# Altium PCB rpi_board.PcbDoc (part 1 of 2)
Units mm, origin at the board's own origin, x right, y up, seen from the top; angles counter-clockwise.
Board outline 68.45 x 53.59 mm, 2 copper layers (Top Layer, Bottom Layer), stack 1.569 mm thick; 73 components, 83 nets, 335 pads, 96 vias.
Unrouted connection lines stored in the file: 3.
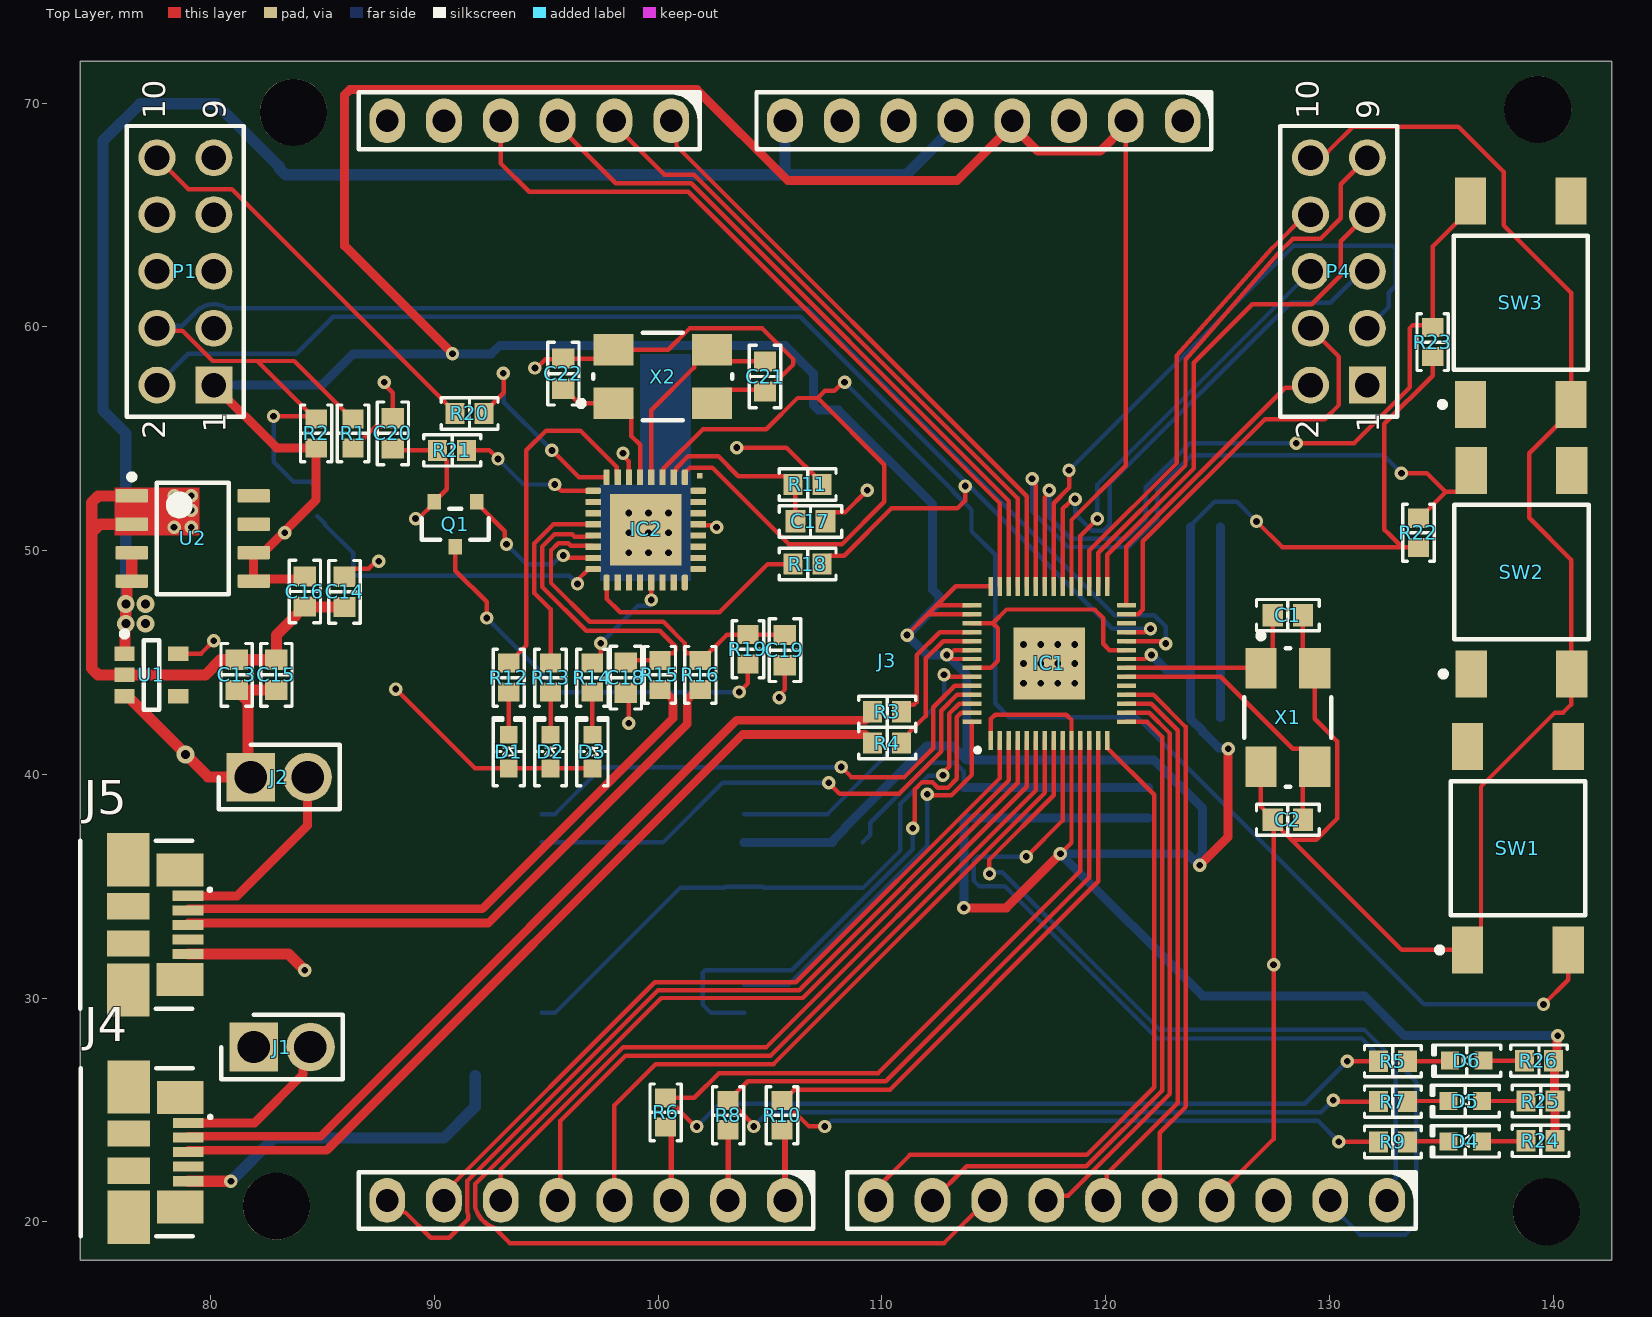
[diagram p0: Top Layer view]
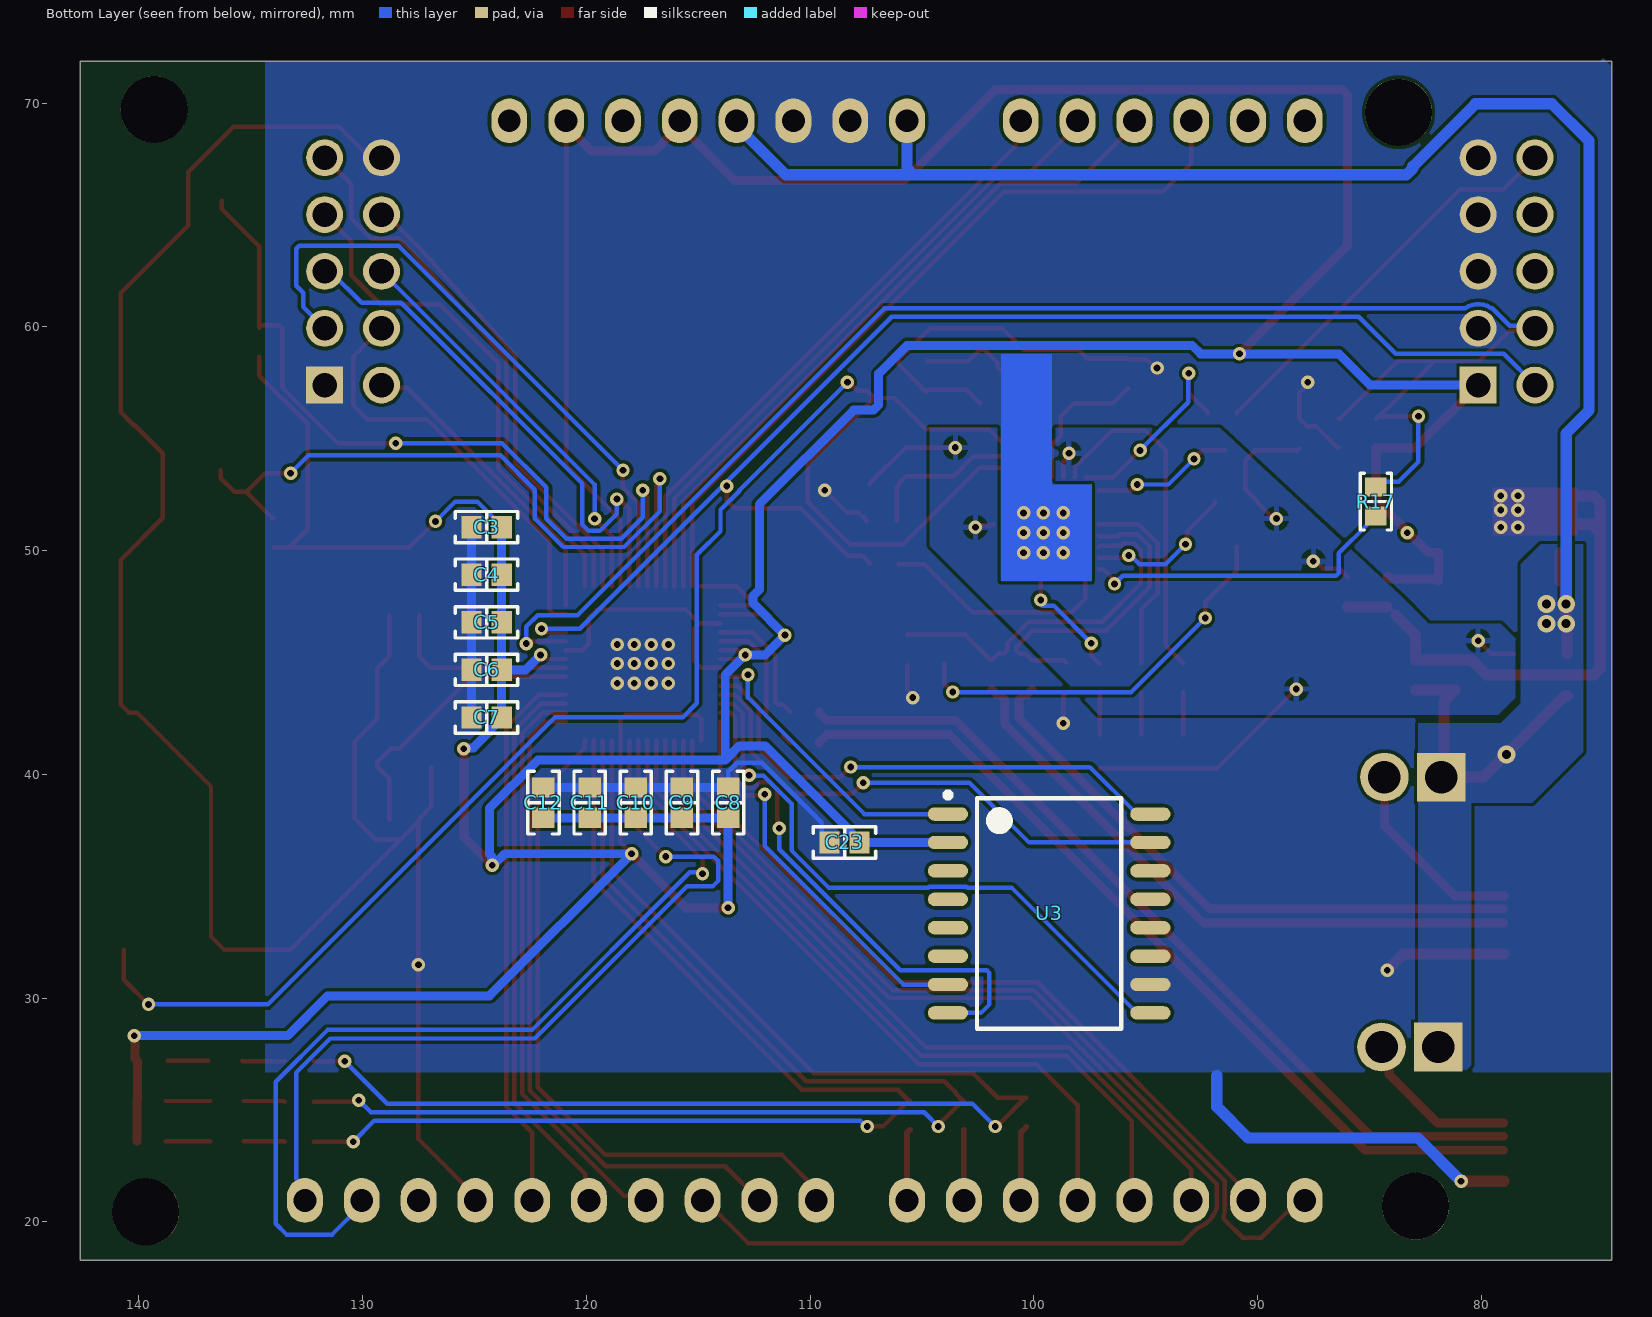
[diagram p1: Bottom Layer view, seen from below]

## Layer stack, top to bottom
Top Solder: solder mask 0.0254, SM-001, Dk 4
Top Layer: signal copper 0.035
Dielectric 1: core 1.4986, Core-043, Dk 4.3
Bottom Layer: signal copper 0.035
Bottom Solder: solder mask 0.0254, SM-001, Dk 4

## Board outline
74.168,18.288 142.621,18.288 142.621,71.882 74.168,71.882

## Design rules (kind name [scope] priority, off if disabled: settings)
Clearance [All] p1: gap=0.15 ignorepadtopadclearanceinfootprint=FALSE
DiffPairsRouting [All] p1: maxlimit=0.254 minlimit=0.2 mostfreqgap=0.2 toplayer_minwidth=0.2 toplayer_maxwidth=0.5 toplayer_prefwidth=0.2 bottomlayer_minwidth=0.2 bottomlayer_maxwidth=0.5 bottomlayer_prefwidth=0.2 maxuncoupledlength=12.7
PolygonConnect PolygonConnect_5 [All vs IsNamedPolygon('GND_L02_P005')] p1: connectstyle=Direct reliefconductorwidth=0.254 reliefentries=4 polygonreliefangle="90 Angle" airgapwidth=0.254
PolygonConnect PolygonConnect_4 [All vs IsNamedPolygon('GND_L02_P004')] p2: connectstyle=Direct reliefconductorwidth=0.254 reliefentries=4 polygonreliefangle="90 Angle" airgapwidth=0.254
PolygonConnect PolygonConnect_3 [All vs IsNamedPolygon('3V3_MCU_L01_P003')] p3: connectstyle=Relief reliefconductorwidth=0.254 reliefentries=4 polygonreliefangle="90 Angle" airgapwidth=0.254
PolygonConnect PolygonConnect_2 [All vs IsNamedPolygon('3V3_MCU_L01_P003')] p4: connectstyle=Direct reliefconductorwidth=0.254 reliefentries=4 polygonreliefangle="90 Angle" airgapwidth=0.254
PolygonConnect PolygonConnect_1 [All vs IsNamedPolygon('5V_L02_P002')] p5: connectstyle=Direct reliefconductorwidth=0.254 reliefentries=4 polygonreliefangle="90 Angle" airgapwidth=0.254
PolygonConnect [All] p6: connectstyle=Relief reliefconductorwidth=0.254 reliefentries=4 polygonreliefangle="90 Angle" airgapwidth=0.254
RoutingVias [All] p1: holewidth=0.3 width=0.6 viastyle="Through Hole" minholewidth=0.3 minwidth=0.6 maxholewidth=0.3 maxwidth=0.6
SolderMaskExpansion [All] p1: expansion=0.102 istentingtop=FALSE
Width [All] p1: maxlimit=0.8 minlimit=0.2 preferedwidth=0.2
29 further rules are at their usual default settings.

## Classes and differential pairs
component class POWER: C13 C14 C15 C16 U1 U2
component class PERIPHERALS: C23 D4 D5 D6 R22 R23 R24 R25 R26 SW2 SW3 U3
component class MCU_CORE: C1 C2 C3 C4 C5 C6 C7 C8 C9 C10 C11 C12 IC1 J1 J4 P1 R1 R2 R3 R4 R5 R6 R7 R8 R9 R10 X1
component class HEADERS: J3 P4
component class DEBUG: C17 C18 C19 C20 C21 C22 D1 D2 D3 IC2 J2 J5 Q1 R11 R12 R13 R14 R15 R16 R17 R18 R19 R20 R21 SW1 X2
differential pair USB_DE: +USB_DE_P -USB_DE_N
differential pair USB_DM: +USB_DM_P -USB_DM_N
differential pair USB_R: +USB_R_P -USB_R_N
differential pair USB_D: +USB_D_P -USB_D_N

## Components (designator, comment, footprint, x,y, rotation, side; value= is the part's Value field where it differs from the comment)
C1 "18pF" "CAP 0603_1608" 128.143,47.117 r180 top
C2 "18pF" "CAP 0603_1608" 128.143,37.973 r0 top
C3 "0.1µF" "CAP 0603_1608" 124.46,51.054 r180 bottom
C4 "0.1µF" "CAP 0603_1608" 124.46,48.927 r180 bottom
C5 "0.1µF" "CAP 0603_1608" 124.46,46.799 r180 bottom
C6 "0.1µF" "CAP 0603_1608" 124.46,44.672 r180 bottom
C7 "0.1µF" "CAP 0603_1608" 124.46,42.545 r180 bottom
C8 "0.1µF" "CAP 0603_1608" 113.665,38.735 r270 bottom
C9 "0.1µF" "CAP 0603_1608" 115.729,38.735 r270 bottom
C10 "0.1µF" "CAP 0603_1608" 117.792,38.735 r270 bottom
C11 "0.1µF" "CAP 0603_1608" 119.856,38.735 r270 bottom
C12 "0.1µF" "CAP 0603_1608" 121.92,38.735 r270 bottom
C13 "1µF" "CAP 0603_1608" 81.153,44.45 r270 top
C14 "10µF" "CAP 0603_1608" 85.979,48.162 r90 top
C15 "0.1µF" "CAP 0603_1608" 82.931,44.45 r270 top
C16 "10µF" "CAP 0603_1608" 84.201,48.173 r90 top
C17 "0.1µF" "CAP 0603_1608" 106.807,51.308 r180 top
C18 "18pF" "CAP 0603_1608" 98.552,44.323 r90 top
C19 "18pF" "CAP 0603_1608" 105.664,45.553 r90 top
C20 "0.1µF" "CAP 0603_1608" 88.138,55.245 r270 top
C21 "18pF" "CAP 0603_1608" 104.775,57.785 r90 top
C22 "18pF" "CAP 0603_1608" 95.758,57.912 r270 top
C23 "0.1µF" "CAP 0603_1608" 108.458,36.957 r180 bottom
D1 "Blue" "LED 0603_1608 BLUE" 93.319,41.021 r90 top
D2 "Blue" "LED 0603_1608 BLUE" 95.186,41.021 r90 top
D3 "Blue" "LED 0603_1608 BLUE" 97.054,41.021 r90 top
D4 "Blue" "LED 0603_1608 BLUE" 136.07,23.596 r180 top
D5 "Blue" "LED 0603_1608 BLUE" 136.07,25.4 r180 top
D6 "Blue" "LED 0603_1608 BLUE" 136.144,27.204 r180 top
IC1 "" QFN40P700X700X90-57N-D 117.475,44.958 r90 top
IC2 "CMSIS-DAP Interface : 32-bit LPC11U00 ARM Cortex M3 RISC 64KB Flash 2.5V/3.3V 33-Pin HVQFN EP" HVQFN33 99.441,50.927 r270 top
J1 "103185-2" HDRV2W89P0X254_1X2_467X234X820P 81.915,27.813 r0 top
J2 "103185-2" HDRV2W89P0X254_1X2_467X234X820P 81.788,39.878 r0 top
J3 "920-0088-01" "SCHMARTBOARD - 920-0088-01" 110.234,45.085 r270 top locked
J4 "47346-0001" 47346-0001 74.184,23.114 r90 top
J5 "47346-0001" 47346-0001 74.168,33.274 r90 top
P1 "61301021121" 61301021121 78.867,62.484 r90 top
P4 "61301021121" 61301021121 130.429,62.484 r90 top
Q1 "BSS84" FP-SOT23-MFG 90.932,51.181 r270 top
R1 "10 k" "RES 0603_1608" 86.36,55.245 r270 top
R2 "10 k" "RES 0603_1608" 84.709,55.245 r270 top
R3 "33R" "RES 0603_1608" 110.236,42.799 r180 top
R4 "33R" "RES 0603_1608" 110.236,41.402 r0 top
R5 "0" "RES 0603_1608" 132.842,27.178 r180 top
R6 "0" "RES 0603_1608" 100.33,24.892 r270 top
R7 "0" "RES 0603_1608" 132.842,25.374 r180 top
R8 "0" "RES 0603_1608" 103.124,24.765 r270 top
R9 "0" "RES 0603_1608" 132.842,23.569 r180 top
R10 "0" "RES 0603_1608" 105.537,24.765 r270 top
R11 "10 k" "RES 0603_1608" 106.68,52.959 r0 top
R12 "470 Ohms" "RES 0603_1608" 93.319,44.323 r270 top
R13 "470 Ohms" "RES 0603_1608" 95.186,44.323 r270 top
R14 "470 Ohms" "RES 0603_1608" 97.054,44.323 r270 top
R15 "33R" "RES 0603_1608" 100.076,44.45 r90 top
R16 "33R" "RES 0603_1608" 101.88,44.45 r90 top
R17 "470 Ohms" "RES 0603_1608" 84.709,52.197 r90 bottom
R18 "470 Ohms" "RES 0603_1608" 106.68,49.403 r0 top
R19 "1.5 k" "RES 0603_1608" 104.013,45.593 r90 top
R20 "470 Ohms" "RES 0603_1608" 91.567,56.134 r180 top
R21 "10 k" "RES 0603_1608" 90.79,54.483 r0 top
R22 "10K Ohms" "RES 0603_1608" 133.985,50.8 r270 top
R23 "10K Ohms" "RES 0603_1608" 134.62,59.324 r270 top
R24 "470 Ohms" "RES 0603_1608" 139.446,23.622 r180 top
R25 "470 Ohms" "RES 0603_1608" 139.446,25.4 r180 top
R26 "470 Ohms" "RES 0603_1608" 139.372,27.204 r180 top
SW1 "FSM4JSMATR" TECO-FSM4JSMATR_V 138.43,36.703 r180 top
SW2 "FSM4JSMATR" TECO-FSM4JSMATR_V 138.593,49.044 r180 top
SW3 "FSM4JSMATR" TECO-FSM4JSMATR_V 138.557,61.087 r180 top
U1 "TC1017-3.3VCTTR" SOT-23-CT5_L 77.343,44.45 r0 top
U2 "TPS77733DR" D0008A_N 79.193,50.546 r0 top locked
U3 "S25FL128SAGMFI011" SPSN-SOIC-16_L 99.314,33.782 r180 bottom
X1 "25MHZ" ABRA-ABMM2-4_V 128.143,42.545 r270 top
X2 "12MHz" ABRA-ABMM2-4_V 100.203,57.785 r0 top

## Footprints (in the part's own frame and the unit in brackets; to place one, negate y for a bottom-side part, rotate by r counter-clockwise, add the part's x,y. Pads: shape width x height; smd on the part's side, far side on the other; paste and mask are expansions set on the pad)
47346-0001 [mm]
  rect 0.45x1.38 smd: 1(1.3,-4.81) 2(0.65,-4.81) 3(0,-4.81) 4(-0.65,-4.81) 5(-1.3,-4.81)
  rect 1.475x2.1 smd: 6(-2.452,-4.45) 7(2.452,-4.45)
  rect 1.175x1.9 smd: 8(0.837,-2.15) 9(-0.837,-2.15)
  rect 2.375x1.9 smd: 10(2.913,-2.15) 11(-2.913,-2.15)
  silkscreen extent -3.75,-5.84 3.75,0, body extent -3.9,-5 3.9,0, height 2.66
61301021121 [mm] "Pin Header, pitch 2.54 mm, THT, Vertical, dual row, 10p"
  rect 1.65x1.65 hole 1.1: 1(-5.08,-1.27)
  round 1.65 hole 1.1: 2(-5.08,1.27) 3(-2.54,-1.27) 4(-2.54,1.27) 5(0,-1.27) 6(0,1.27) 7(2.54,-1.27) 8(2.54,1.27) 9(5.08,-1.27) 10(5.08,1.27)
  silkscreen extent -6.5,-2.62 6.5,2.62, body extent -6.35,-2.54 6.35,2.54, height 8.59
ABRA-ABMM2-4_V [mm] "SMD, 4-Leads, Body 6.2x3.9mm, Pitch 4.4mm, Height 1.2mm"
  rect 1.8x1.4 smd: 1(-2.2,-1.2) 2(2.2,-1.2) 3(2.2,1.2) 4(-2.2,1.2)
  silkscreen extent -3.77,-1.95 3.1,1.95, body extent -3.1,-1.95 3.1,1.95, height 1.2
"CAP 0603_1608" [mm] "Chip Capacitor, 2-Leads, Body 1.60x0.80mm, IPC Medium Density"
  rect 0.9x1 smd: 1(-0.675,0) 2(0.675,0)
  silkscreen extent -1.4,-0.7 1.4,0.7, body extent -0.8,-0.41 0.8,0.41, height 0.82
D0008A_N [mm] "SOIC, 8-Leads, Body 5x4mm, Pitch 1.27mm, IPC Medium Density"
  rrect17% 1.45x0.6 smd: 1(-2.725,1.905) 2(-2.725,0.635) 3(-2.725,-0.635) 4(-2.725,-1.905) 5(2.725,-1.905) 6(2.725,-0.635) 7(2.725,0.635) 8(2.725,1.905)
  silkscreen extent -2.85,-2.5 1.6,2.88, body extent -3,-2.45 3,2.45, height 1.63
FP-SOT23-MFG [mm]
  rect 0.7x0.6 smd paste-1000 mask+0: 1(-1,0.95) 2(-1,-0.95) 3(1,0)
  silkscreen extent -0.7,-1.5 0.7,1.5, body extent -1.5,-1.65 1.5,1.65, height 0.25
HDRV2W89P0X254_1X2_467X234X820P [mm]
  rect 2.175x2.175 hole 1.45: 1(0,0)
  round 2.175 hole 1.45: 2(2.54,0)
  silkscreen extent -1.44,-1.44 3.98,1.44, body extent -1.07,-1.17 3.61,1.17, height 8.13
HVQFN33 [mm]
  rrect50% 0.7x0.28 smd mask+0: 1(-2.35,1.75) 8(-2.35,-1.75) 17(2.35,-1.75) 24(2.35,1.75)
  rect 0.7x0.28 smd mask+0: 2(-2.35,1.25) 3(-2.35,0.75) 4(-2.35,0.25) 5(-2.35,-0.25) 6(-2.35,-0.75) 7(-2.35,-1.25) 18(2.35,-1.25) 19(2.35,-0.75) 20(2.35,-0.25) 21(2.35,0.25) 22(2.35,0.75) 23(2.35,1.25)
  rrect50% 0.28x0.7 smd mask+0: 9(-1.75,-2.35) 16(1.75,-2.35) 25(1.75,2.35) 32(-1.75,2.35)
  rect 0.28x0.7 smd mask+0: 10(-1.25,-2.35) 11(-0.75,-2.35) 12(-0.25,-2.35) 13(0.25,-2.35) 14(0.75,-2.35) 26(1.25,2.35) 27(0.75,2.35) 28(0.25,2.35) 29(-0.25,2.35) 30(-0.75,2.35) 31(-1.25,2.35)
  rect 0.28x0.7 smd paste+0 mask+0: 15(1.25,-2.35)
  rect 3.2x3.2 smd: EXP(0,0)
  rect 0.25x0.25 smd: M1(-2.415,2.415)
"LED 0603_1608 BLUE" [mm] "Chip Diode, 2-Leads, Body 1.60x0.80mm, IPC Medium Density"
  rect 0.8x0.8 smd: 1(-0.75,0) 2(0.75,0)
  silkscreen extent -1.52,-0.7 1.52,0.7, body extent -0.8,-0.4 0.8,0.4, height 0.53
QFN40P700X700X90-57N-D [mm]
  rect 0.85x0.2 smd: 1(-3.45,2.6) 2(-3.45,2.2) 3(-3.45,1.8) 4(-3.45,1.4) 5(-3.45,1) 6(-3.45,0.6) 7(-3.45,0.2) 8(-3.45,-0.2) 9(-3.45,-0.6) 10(-3.45,-1) 11(-3.45,-1.4) 12(-3.45,-1.8) 13(-3.45,-2.2) 14(-3.45,-2.6) 29(3.45,-2.6) 30(3.45,-2.2) 31(3.45,-1.8) 32(3.45,-1.4) 33(3.45,-1) 34(3.45,-0.6) 35(3.45,-0.2) 36(3.45,0.2) 37(3.45,0.6) 38(3.45,1) 39(3.45,1.4) 40(3.45,1.8) 41(3.45,2.2) 42(3.45,2.6)
  rect 0.2x0.85 smd: 15(-2.6,-3.45) 16(-2.2,-3.45) 17(-1.8,-3.45) 18(-1.4,-3.45) 19(-1,-3.45) 20(-0.6,-3.45) 21(-0.2,-3.45) 22(0.2,-3.45) 23(0.6,-3.45) 24(1,-3.45) 25(1.4,-3.45) 26(1.8,-3.45) 27(2.2,-3.45) 28(2.6,-3.45) 43(2.6,3.45) 44(2.2,3.45) 45(1.8,3.45) 46(1.4,3.45) 47(1,3.45) 48(0.6,3.45) 49(0.2,3.45) 50(-0.2,3.45) 51(-0.6,3.45) 52(-1,3.45) 53(-1.4,3.45) 54(-1.8,3.45) 55(-2.2,3.45) 56(-2.6,3.45)
  rect 3.2x3.2 smd: 57(0,0)
  silkscreen extent -3.97,3.1 -3.78,3.3, body extent -3.55,-3.55 3.55,3.55, height 0.9
"RES 0603_1608" [mm] "Chip Resistor, 2-Leads, Body 1.60x0.80mm, IPC Medium Density"
  rect 0.85x0.95 smd: 1(-0.65,0) 2(0.65,0)
  silkscreen extent -1.27,-0.7 1.27,0.7, body extent -0.8,-0.4 0.8,0.4, height 0.45
"SCHMARTBOARD - 920-0088-01" [mm] "Arduino pin header set"
  oval 2x1.6 hole 1.02: 1(-24.13,13.21) 2(-24.13,10.67) 3(-24.13,8.13) 4(-24.13,5.59) 5(-24.13,3.05) 6(-24.13,0.51) 7(-24.13,-2.03) 8(-24.13,-4.57) 9(-24.13,-9.65) 10(-24.13,-12.19) 11(-24.13,-14.73) 12(-24.13,-17.27) 13(-24.13,-19.81) 14(-24.13,-22.35) 15(24.13,-22.35) 16(24.13,-19.81) 17(24.13,-17.27) 18(24.13,-14.73) 19(24.13,-12.19) 20(24.13,-9.65) 21(24.13,-7.11) 22(24.13,-4.57) 23(24.13,-0.51) 24(24.13,2.03) 25(24.13,4.57) 26(24.13,7.11) 27(24.13,9.65) 28(24.13,12.19) 29(24.13,14.73) 30(24.13,17.27) 31(24.13,19.81) 32(24.13,22.35)
  silkscreen extent -25.4,-23.62 25.4,23.62, body extent -25.4,-23.62 25.4,23.62, height 8.5
SOT-23-CT5_L [mm] "SOT23, 5-Leads, Body 2.9x1.7mm, Pitch 0.95mm, Lead Span 2.8mm, IPC High Density"
  rect 0.9x0.65 smd: 1(-1.2,0.95) 2(-1.2,0) 3(-1.2,-0.95) 4(1.2,-0.95) 5(1.2,0.95)
  silkscreen extent -1.32,-1.55 0.35,1.95, body extent -0.9,-1.55 0.9,1.55, height 1.45
SPSN-SOIC-16_L [mm] "SOIC, 16-Leads, Body 10.3x7.5mm, Pitch 1.27mm, IPC High Density"
  oval 1.8x0.6 smd: 1(-4.525,4.445) 2(-4.525,3.175) 3(-4.525,1.905) 4(-4.525,0.635) 5(-4.525,-0.635) 6(-4.525,-1.905) 7(-4.525,-3.175) 8(-4.525,-4.445) 9(4.525,-4.445) 10(4.525,-3.175) 11(4.525,-1.905) 12(4.525,-0.635) 13(4.525,0.635) 14(4.525,1.905) 15(4.525,3.175) 16(4.525,4.445)
  silkscreen extent -4.65,-5.15 3.22,5.42, body extent -3.75,-5.15 3.75,5.15, height 2.65
TECO-FSM4JSMATR_V [mm] "SMD, 4-Leads, Body 6x6mm, Pitch 4.5mm"
  rect 1.4x2.1 smd: 1(2.25,4.55) 2(2.25,-4.55) 3(-2.25,4.55) 4(-2.25,-4.55)
  silkscreen extent -3,-3 3.62,4.67, body extent -3,-5 3,5, height 5.08

## Part data
C1 C2 C18 C19 C21 C22: library part VJ0603A180FXQCW1BC, "CAP CER 18PF 10V C0G/NP0 0603", Device Package="0603 (1608 Metric)", Manufacturer="Vishay Vitramon", Operating Temperature="-55°C ~ 125°C", Supplier Part Number 1=720-1660-1-ND, Temperature Coefficient="C0G, NP0", Tolerance=±1%, Voltage - Rated=10V, Applications="General Purpose", Capacitance=18pF, ComponentLink1Description=Datasheet, ComponentLink1URL=https://www.vishay.com/docs/28548/vjw1bcbascomseries.pdf, ComponentLink2Description="DigiKey Link", ComponentLink2URL=http://digikey.com/product-detail/en/vishay-vitramon/VJ0603A180FXQCW1BC/720-1660-1-ND/8324080, LastUpdated="02.09.2020 1:03:27", Lifecycle Status=Active, Minimum Order=1, Mounting Type="Surface Mount, MLCC", Package / Case="0603 (1608 Metric)", Packaging=TapeAndReel, Part Number=VJ0603A180FXQCW1BC, Part Status=Active, PartId=7094, Price=0.04, Series=VJ, Size / Dimension="0.063\" L x 0.031\" W (1.60mm x 0.80mm)", Supplier 1=DigiKey, Thickness (Max)="0.034\" (0.87mm)"
C3 C4 C5 C6 C7 C8 C9 C10 C11 C12 C23: library part C0603C104K5RAC7411, "CAP CER 0.1UF 50V X7R 0603", Device Package="0603 (1608 Metric)", Manufacturer=KEMET, Operating Temperature="-55°C ~ 125°C", Supplier Part Number 1=399-7374-2-ND, Temperature Coefficient=X7R, Tolerance=±10%, Voltage - Rated=50V, Applications="Bypass, Decoupling", Capacitance=0.1µF, ComponentLink1Description=Datasheet, ComponentLink1URL=https://api.kemet.com/component-edge/download/datasheet/C0603C104K5RAC7411.pdf, ComponentLink2Description="DigiKey Link", ComponentLink2URL=http://digikey.com/product-detail/en/kemet/C0603C104K5RAC7411/399-7374-2-ND/3317013, LastUpdated="02.09.2020 1:03:36", Lifecycle Status=Active, Minimum Order=15000, Mounting Type="Surface Mount, MLCC", Package / Case="0603 (1608 Metric)", Packaging=TapeAndReel, Part Number=C0603C104K5RAC7411, Part Status=Active, PartId=2233, Price=0.02, Series="SMD Comm X7R", Size / Dimension="0.063\" L x 0.031\" W (1.60mm x 0.80mm)", Supplier 1=DigiKey, Thickness (Max)="0.035\" (0.90mm)"
C13: library part C0603X105M4RACAUTO, "CAP CER 0603 1UF 16V X7R 20%", Device Package="0603 (1608 Metric)", Manufacturer=KEMET, Operating Temperature="-55°C ~ 125°C", Ratings=AEC-Q200, Supplier Part Number 1=399-17719-1-ND, Temperature Coefficient=X7R, Tolerance=±20%, Voltage - Rated=16V, Applications="Automotive, Boardflex Sensitive", Capacitance=1µF, ComponentLink1Description=Datasheet, ComponentLink1URL=https://api.kemet.com/component-edge/download/datasheet/C0603X105M4RACAUTO.pdf, ComponentLink2Description="DigiKey Link", ComponentLink2URL=http://digikey.com/product-detail/en/kemet/C0603X105M4RACAUTO/399-17719-1-ND/8635870, Features="Soft Termination", LastUpdated="02.09.2020 1:03:33", Lifecycle Status=Active, Minimum Order=1, Mounting Type="Surface Mount, MLCC", Package / Case="0603 (1608 Metric)", Packaging=TapeAndReel, Part Number=C0603X105M4RACAUTO, Part Status=Active, PartId=3927, Price=0.07, Series="SMD Auto X7R Flex", Size / Dimension="0.063\" L x 0.031\" W (1.60mm x 0.80mm)", Supplier 1=DigiKey, Thickness (Max)="0.037\" (0.95mm)"
C14 C16: library part GRT188R61C106KE13D, "CAP CER 10UF 16V X5R 0603", Device Package="0603 (1608 Metric)", Manufacturer="Murata Electronics", Operating Temperature="-55°C ~ 85°C", Ratings=AEC-Q200, Supplier Part Number 1=490-12317-1-ND, Temperature Coefficient=X5R, Tolerance=±10%, Voltage - Rated=16V, Applications=Automotive, Capacitance=10µF, ComponentLink1Description=Datasheet, ComponentLink1URL=https://search.murata.co.jp/Ceramy/image/img/A01X/G101/ENG/GRT188R61C106KE13-01.pdf, ComponentLink2Description="DigiKey Link", ComponentLink2URL=http://digikey.com/product-detail/en/murata-electronics/GRT188R61C106KE13D/490-12317-1-ND/5417018, LastUpdated="02.09.2020 1:03:11", Lifecycle Status=Active, Minimum Order=1, Mounting Type="Surface Mount, MLCC", Package / Case="0603 (1608 Metric)", Packaging=TapeAndReel, Part Number=GRT188R61C106KE13D, Part Status=Active, PartId=14922, Price=0.10, Series=GRT, Size / Dimension="0.063\" L x 0.031\" W (1.60mm x 0.80mm)", Supplier 1=DigiKey, Thickness (Max)="0.035\" (0.90mm)"
C15: library part CS0603KRX7R7BB104, "CAP CER 0.1UF 16V X7R 0603", Device Package="0603 (1608 Metric)", Manufacturer=Yageo, Operating Temperature="-55°C ~ 125°C", Supplier Part Number 1=311-3560-1-ND, Temperature Coefficient=X7R, Tolerance=±10%, Voltage - Rated=16V, Applications="Boardflex Sensitive", Capacitance=0.1µF, ComponentLink1Description=Datasheet, ComponentLink1URL=http://www.yageo.com/NewPortal/yageodocoutput?fileName=/pdf/MLCC/UPY-ST_NPOX7R_16V-to-3KV_5.pdf, ComponentLink2Description="DigiKey Link", ComponentLink2URL=http://digikey.com/product-detail/en/yageo/CS0603KRX7R7BB104/311-3560-1-ND/7648487, Features="Soft Termination", LastUpdated="02.09.2020 1:03:36", Lifecycle Status=Active, Minimum Order=1, Mounting Type="Surface Mount, MLCC", Package / Case="0603 (1608 Metric)", Packaging=TapeAndReel, Part Number=CS0603KRX7R7BB104, Part Status=Active, PartId=2286, Price=0.02, Series=CS, Size / Dimension="0.063\" L x 0.031\" W (1.60mm x 0.80mm)", Supplier 1=DigiKey, Thickness (Max)="0.037\" (0.95mm)"
C17 C20: library part C0603T104K8RAC7867, "CAP CER 0.1UF 10V X7R 0603", Device Package="0603 (1608 Metric)", Manufacturer=KEMET, Operating Temperature="-55°C ~ 125°C", Ratings=COTS, Supplier Part Number 1=399-20424-1-ND, Temperature Coefficient=X7R, Tolerance=±10%, Voltage - Rated=10V, Applications="High Reliability, Bypass, Decoupling", Capacitance=0.1µF, ComponentLink1Description=Datasheet, ComponentLink1URL=https://api.kemet.com/component-edge/download/datasheet/C0603T104K8RAC7867.pdf, ComponentLink2Description="DigiKey Link", ComponentLink2URL=http://digikey.com/product-detail/en/kemet/C0603T104K8RAC7867/399-20424-1-ND/9925028, LastUpdated="02.09.2020 1:03:35", Lifecycle Status=Active, Minimum Order=1, Mounting Type="Surface Mount, MLCC", Package / Case="0603 (1608 Metric)", Packaging=TapeAndReel, Part Number=C0603T104K8RAC7867, Part Status=Active, PartId=2528, Price=0.23, Series="SMD COTS X7R", Size / Dimension="0.063\" L x 0.031\" W (1.60mm x 0.80mm)", Supplier 1=DigiKey, Thickness (Max)="0.034\" (0.87mm)"
D1 D2 D3 D4 D5 D6: library part VLMB1300-GS08, "LED BLUE 0603 SMD", Current - Test=20mA, Device Package="0603 (1608 Metric)", Lens Color=1.00mm, Manufacturer="Vishay Semiconductor Opto Division", Millicandela Rating=104mcd, Supplier Device Package=0603, Supplier Part Number 1=VLMB1300-GS08CT-ND, Voltage - Forward (Vf) (Typ)=3.3V, Color=Blue, ComponentLink1Description=Datasheet, ComponentLink1URL=http://www.vishay.com/docs/82437/vlmo1300.pdf, ComponentLink2Description="DigiKey Link", ComponentLink2URL=http://digikey.com/product-detail/en/vishay-semiconductor-opto-division/VLMB1300-GS08/VLMB1300-GS08CT-ND/3025485, Configuration=Standard, Height (Max)=1.00mm, LastUpdated="02.09.2020 1:20:26", Lens Size="1.10mm x 0.80mm", Lens Style="Rectangle with Flat Top", Lifecycle Status=Active, Minimum Order=1, Mounting Type="Surface Mount", Package / Case="0603 (1608 Metric)", Packaging=TapeAndReel, Part Number=VLMB1300-GS08, Part Status=Active, PartId=785, Price=0.08, Series=CHIPLED, Size / Dimension="1.60mm L x 0.80mm W", Supplier 1=DigiKey, Viewing Angle=130°, Wavelength - Dominant=470nm, Wavelength - Peak=468nm
IC1: library part RP2040, "Integrated Circuit", Manufacturer_Name=RASPBERRY-PI, Datasheet Link=https://datasheets.raspberrypi.org/rp2040/rp2040-datasheet.pdf, Height=0.9mm, Manufacturer_Part_Number=RP2040
IC2: library part IF_LPC11U35FHI33/501, Package=HVQFN33, Supplier Part Number 1=2115658, DeviceSetName=IF_LPC11U35FHI33/501, GateName_1=G$1, LibraryName=mbed-HDK-MF-NXP, MF=NXP, MFN=LPC11U35FHI33/501, OC-DIGIKEY=568-9586-ND, OC-MOUSER=771-LPC11U35FHI33501, OC-NEWARK=2115658, Supplier 1=Farnell, SymbolName_1=IF-LPC11U35
J1 J2: "02 MODII HDR SRST B/A .100CL", Package=None, Availability=Unavailable, MP=103185-2, Price=None
J3: "CONN HDR 8/10P 0.1 GOLD PCB 6PC", Insulation Color=Black, Manufacturer="Schmartboard, Inc.", Supplier Part Number 1=1988-1036-ND, ComponentLink1Description=Datasheet, ComponentLink1URL=http://schmartboard.com/content/Brochures/920-0088-01.pdf, ComponentLink2Description="DigiKey Link", ComponentLink2URL=http://digikey.com/product-detail/en/schmartboard-inc/920-0088-01/1988-1036-ND/9559319, Connector Type=Header, Contact Finish - Mating=Gold, Contact Finish - Post=Gold, Contact Length - Post="0.413\" (10.50mm)", Contact Type="Female Socket", Fastening Type=Push-Pull, Insulation Height="0.335\" (8.51mm)", LastUpdated="31.01.2020 20:49:58", Lifecycle Status=Active, Minimum Order=1, Mounting Type="Through Hole", Number of Positions="6, 8, 10", Number of Positions Loaded=All, Number of Rows=1, Packaging=Bulk, Part Number=920-0088-01, Part Status=Active, Pitch - Mating="0.100\" (2.54mm)", Price=5.00, Series=-, Style="Board to Board", Supplier 1=DigiKey, Termination=Solder
J4 J5: "Connector", Manufacturer_Name=Molex, Mouser Part Number=538-47346-0001, Datasheet Link=http://www.molex.com/pdm_docs/sd/473460001_sd.pdf, Manufacturer_Part_Number=47346-0001, Mouser Price/Stock=https://www.mouser.co.uk/ProductDetail/Molex/47346-0001?qs=c2CV6XM0DweJBWaSeyWeCw%3D%3D
P1 P4: library part CMP-1502-01084-1, "THT Vertical Pin Header WR-PHD, Pitch 2.54 mm, Dual Row, 10 pins", Contact Resistance=20mOhm, Manufacturer="Wurth Elektronik", Operating Temperature=-40to105degC, Rated Current=3A, Withstanding Voltage=500VAC, Working Voltage=250VAC, Datasheet URL=https://katalog.we-online.de/em/datasheet/6130xx21121.pdf, Gender=Male, Manufacturer URL=http://www.we-online.de, Mounting Technology=THT, Orientation=Vertical, Package Reference=61301021121, Packaging=Bag, Part Number=61301021121, Pin Number=10, Pitch=2.54mm, Publisher=WurthElektronik, Row Number=Dual
Q1: library part CMP-14409-000006-1, "MOSFET P-CH 50V 130MA SOT-23", Continuous Drain Current=-130mA, Drain To Source Breakdown Voltage=-50V, Drain To Source Resistance=6Ω, Gate To Source Voltage=20V, Input Capacitace At Vds="25pF @ -25V", Manufacturer="Nexperia USA Inc.", Manufacturer Part Number=BSS84,215, Max Junction Temp=+150°C, Package=SOT23, Power Dissipation=250mW, Temperature="-65°C to +150°C", Temperature Range Low=-65°C, Automotive=No, Category=Trans, ComponentLink2Description=Datasheet, ComponentLink2URL=https://assets.nexperia.com/documents/data-sheet/BSS84.pdf, Depletion Mode=False, Device Class L1="Discrete Semiconductors", Device Class L2=Transistors, Device Class L3=MOSFETs, Digikey Description="MOSFET P-CH 50V 130MA SOT-23", Drain To Source Voltage=-50V, Footprint Url=https://assets.nexperia.com/documents/outline-drawing/SOT23.pdf, Height=1.1mm, Ipc Land Pattern Name=SOT95P230X100-3, Lead Free=Yes, Number Of Channels=1, Number Of P Channels=1, Octopart=https://octopart.com/bss84%2C215-nexperia-78739375, RoHS=TRUE, Rthja Max=500K/W, Temperature Range High=+150°C, Threshold Vgs Max=-2V, Threshold Vgs Min=-0.8V, Turn Off Delay Time=7ns, Turn On Delay Time=3ns
R1 R2 R11 R21: library part RNCS0603BKE10K0, "RES 10K OHM 0.1% 1/16W 0603", Device Package="0603 (1608 Metric)", Manufacturer="Stackpole Electronics Inc", Operating Temperature="-55°C ~ 155°C", Power (Watts)="0.063W, 1/16W", Ratings=AEC-Q200, Resistance="10 kOhms", Supplier Device Package=0603, Supplier Part Number 1=RNCS0603BKE10K0CT-ND, Temperature Coefficient=±25ppm/°C, Tolerance=±0.1%, ComponentLink1Description=Datasheet, ComponentLink1URL=https://www.seielect.com/catalog/sei-rncs_rnch.pdf, ComponentLink2Description="DigiKey Link", ComponentLink2URL=http://digikey.com/product-detail/en/stackpole-electronics-inc/RNCS0603BKE10K0/RNCS0603BKE10K0CT-ND/1800113, Composition="Thin Film", Features="Anti-Corrosive, Automotive AEC-Q200, Moisture Resistant", Height - Seated (Max)="0.022\" (0.55mm)", LastUpdated="02.09.2020 1:10:25", Lifecycle Status=Active, Minimum Order=1, Number of Terminations=2, Package / Case="0603 (1608 Metric)", Packaging=TapeAndReel, Part Number=RNCS0603BKE10K0, Part Status=Active, PartId=4838, Price=0.08, Series=RNCS, Size / Dimension="0.061\" L x 0.031\" W (1.55mm x 0.80mm)", Supplier 1=DigiKey
R3 R4 R15 R16: library part CPF0603B33RE, "RES SMD 33 OHM 0.1% 1/16W 0603", Device Package="0603 (1608 Metric)", Manufacturer="TE Connectivity Passive Product", Operating Temperature="-55°C ~ 155°C", Power (Watts)="0.063W, 1/16W", Resistance="33 Ohms", Supplier Device Package=0603, Supplier Part Number 1=A119909CT-ND, Temperature Coefficient=±25ppm/°C, Tolerance=±0.1%, ComponentLink1Description=Datasheet, ComponentLink1URL=https://www.te.com/commerce/DocumentDelivery/DDEController?Action=srchrtrv&DocNm=1773200&DocType=DS&DocLang=English, ComponentLink2Description="DigiKey Link", ComponentLink2URL=http://digikey.com/product-detail/en/te-connectivity-passive-product/CPF0603B33RE/A119909CT-ND/4966507, Composition="Thin Film", Height - Seated (Max)="0.022\" (0.55mm)", LastUpdated="02.09.2020 1:10:25", Lifecycle Status=Active, Minimum Order=1, Number of Terminations=2, Package / Case="0603 (1608 Metric)", Packaging=TapeAndReel, Part Number=CPF0603B33RE, Part Status=Active, PartId=4881, Price=0.09, Series="CPF, Neohm", Size / Dimension="0.061\" L x 0.031\" W (1.55mm x 0.80mm)", Supplier 1=DigiKey
R5 R6 R7 R8 R9 R10: library part TLRZ1JTTD, "RES 0 OHM JUMPER 0603", Device Package="0603 (1608 Metric)", Manufacturer="KOA Speer Electronics, Inc.", Operating Temperature="-55°C ~ 170°C", Ratings=AEC-Q200, Supplier Device Package=0603, Supplier Part Number 1=2019-TLRZ1JTTDCT-ND, Tolerance=Jumper, ComponentLink1Description=Datasheet, ComponentLink1URL=http://www.koaspeer.com/catimages/Products/TLRZ/TLRZ.pdf, ComponentLink2Description="DigiKey Link", ComponentLink2URL=http://digikey.com/product-detail/en/koa-speer-electronics-inc/TLRZ1JTTD/2019-TLRZ1JTTDCT-ND/9847537, Composition="Metal Element", Features="Automotive AEC-Q200, Current Sense", Height - Seated (Max)="0.022\" (0.55mm)", LastUpdated="02.09.2020 1:10:25", Lifecycle Status=Active, Minimum Order=1, Number of Terminations=2, Package / Case="0603 (1608 Metric)", Packaging=TapeAndReel, Part Number=TLRZ1JTTD, Part Status=Active, PartId=4851, Price=0.08, Series=TLRZ, Size / Dimension="0.063\" L x 0.031\" W (1.60mm x 0.80mm)", Supplier 1=DigiKey
R12 R13 R14 R17 R18 R20 R24 R25 R26: library part CRCW0603470RJNEAHP, "RES SMD 470 OHM 5% 1/4W 0603", Device Package="0603 (1608 Metric)", Manufacturer="Vishay Dale", Operating Temperature="-55°C ~ 155°C", Power (Watts)="0.25W, 1/4W", Ratings=AEC-Q200, Supplier Device Package=0603, Supplier Part Number 1=541-470SACT-ND, Temperature Coefficient=±200ppm/°C, Tolerance=±5%, ComponentLink1Description=Datasheet, ComponentLink1URL=http://www.vishay.com/docs/20043/crcwhpe3.pdf, ComponentLink2Description="DigiKey Link", ComponentLink2URL=http://digikey.com/product-detail/en/vishay-dale/CRCW0603470RJNEAHP/541-470SACT-ND/2222809, Composition="Thick Film", Features="Automotive AEC-Q200, Pulse Withstanding", Height - Seated (Max)="0.022\" (0.55mm)", LastUpdated="02.09.2020 1:09:49", Lifecycle Status=Active, Minimum Order=1, Number of Terminations=2, Package / Case="0603 (1608 Metric)", Packaging=TapeAndReel, Part Number=CRCW0603470RJNEAHP, Part Status=Active, PartId=21320, Price=0.02, Resistance="470 Ohms", Series=CRCW-HP, Size / Dimension="0.063\" L x 0.033\" W (1.60mm x 0.85mm)", Supplier 1=DigiKey
R19: library part CRGP0603F1K5, "CRGP 0603 1K5 1%", Device Package="0603 (1608 Metric)", Manufacturer="TE Connectivity Passive Product", Operating Temperature="-55°C ~ 155°C", Power (Watts)="0.25W, 1/4W", Resistance="1.5 kOhms", Supplier Device Package=0603, Supplier Part Number 1=A130418CT-ND, Temperature Coefficient=±100ppm/°C, Tolerance=±1%, ComponentLink1Description=Datasheet, ComponentLink1URL=https://www.te.com/commerce/DocumentDelivery/DDEController?Action=srchrtrv&DocNm=9-1773463-9&DocType=DS&DocLang=English, ComponentLink2Description="DigiKey Link", ComponentLink2URL=http://digikey.com/product-detail/en/te-connectivity-passive-product/CRGP0603F1K5/A130418CT-ND/8578250, Composition="Thick Film", Features="Pulse Withstanding", Height - Seated (Max)="0.022\" (0.55mm)", LastUpdated="02.09.2020 1:10:24", Lifecycle Status=Active, Minimum Order=1, Number of Terminations=2, Package / Case="0603 (1608 Metric)", Packaging=TapeAndReel, Part Number=CRGP0603F1K5, Part Status=Active, PartId=5000, Price=0.02, Series=CRGP, Size / Dimension="0.063\" L x 0.031\" W (1.60mm x 0.80mm)", Supplier 1=DigiKey
R22 R23: library part CRCW0603470RJNEAHP, "RES SMD 470 OHM 5% 1/4W 0603", Device Package="0603 (1608 Metric)", Manufacturer="Vishay Dale", Operating Temperature="-55°C ~ 155°C", Power (Watts)="0.25W, 1/4W", Ratings=AEC-Q200, Resistance="470 Ohms", Supplier Device Package=0603, Supplier Part Number 1=3495224, Temperature Coefficient=±200ppm/°C, Tolerance=±5%, ComponentLink1Description=Datasheet, ComponentLink1URL=http://www.vishay.com/docs/20043/crcwhpe3.pdf, ComponentLink2Description="DigiKey Link", ComponentLink2URL=http://digikey.com/product-detail/en/vishay-dale/CRCW0603470RJNEAHP/541-470SACT-ND/2222809, Composition="Thick Film", Features="Automotive AEC-Q200, Pulse Withstanding", Height - Seated (Max)="0.022\" (0.55mm)", LastUpdated="02.09.2020 1:09:49", Lifecycle Status=Active, Minimum Order=1, Number of Terminations=2, Package / Case="0603 (1608 Metric)", Packaging=TapeAndReel, Part Number=CRCW0603470RJNEAHP, Part Status=Active, PartId=21320, Price=0.02, Series=CRCW-HP, Size / Dimension="0.063\" L x 0.033\" W (1.60mm x 0.85mm)", Supplier 1=Farnell
SW1 SW2 SW3: library part CMP-2000-07486-1, "Micro Miniature Push Button Switch FSM JSM, 50 mA, -35 to 85 degC, 4-Pin SMD, RoHS, Tape and Reel", Capacitance=0f, Case\/Package=SMD/SMT, Contact Current Rating=50mA, Contact Resistance=100mOhm, Manufacturer="TE Connectivity", Max Operating Temperature=85degC, Max Voltage Rating (DC)=12V, Min Operating Temperature=-35degC, Operating Force=160gf, Package Description="4-Pin Surface Mount Device, Body 6 x 6 mm, Pitch 4.5 mm", Package Quantity=1200, Voltage Rating (DC)=24V, Actuator Length=0.055inch, Actuator Material=Polyamide, Contact Material=CopperAlloy, Contact Plating=Silver, Current Rating=50mA, Datasheet URL=http://www.te.com/commerce/DocumentDelivery/DDEController?Action=showdoc&DocId=Customer+Drawing%7F2-1437565-7%7FV%7Fpdf%7FEnglish%7FENG_CD_2-1437565-7_V.pdf%7F4-1437565-2, Datasheet Version="Rev. V, 02/2015", Electrical Life=100000Cycles, Illumination Type=Illuminated, Manufacturer URL=http://www.te.com/, Mechanical Life=100000Cycles, Mount=SurfaceMount, Mounting Technology=SurfaceMount, Orientation=Straight, Package Reference=FSM4JSMATR, Packaging=TapeandReel, REACH SVHC=Unknown, RoHSCompliant=true, Switch Travel=0.25mm, Termination=GullWing, Throw Configuration=SPST
U1: library part CMP-0136-00743-1, "150 mA, Tiny CMOS LDO with Shutdown, 5-Pin SOT-23, Extended Temperature, Tape and Reel", Code_IPC=SOT23-5, DatasheetVersion="revD, 2005", PackageDescription="5-Lead Plastic Small Outline Transistor (CT) [SOT-23]", PackageReference=SOT-23-CT5, PackageVersion="revBB, Aug-2009"
U2: library part CMP-0395-00062-2, "Single Output Fast Transient Response LDO, 750 mA, Fixed 3.3 V Output, 2.7 to 10 V Input, 8-pin SOIC (D), -40 to 125 degC, Green (RoHS & no Sb/Br)", Manufacturer="Texas Instruments", Accuracy(%)=2, Code_JEDEC=MS-012, ComponentLink1Description="Manufacturer URL", ComponentLink1URL=http://www.ti.com/, ComponentLink2Description=Datasheet, ComponentLink2URL=http://www.ti.com/general/docs/lit/getliterature.tsp?genericPartNumber=TPS77733&fileType=pdf, ComponentLink3Description="Package Specification", ComponentLink3URL=http://www.ti.com/litv/pdf/msoi002j, DatasheetVersion=SLVS230G, Eco-Plan="Green (RoHS & no Sb/Br)", Fixed Output Options(V)=3.3, Iout(Max)(A)=0.75, Iq(Typ)(mA)=0.08, Mounting Technology="Surface Mount", PackageDescription="8-Pin Plastic Small Outline, Body 4.9 x 3.9 mm, Pitch 1.27 mm", PackageReference=D0008A, PackageVersion=4040047-3/M, PartNumber=TPS77733DR, SubFamily="Single Channel LDO", Vdo(Typ)(mV)=260, Vin(Max)(V)=10, Vin(Min)(V)=2.7, Vout Adj(Max)(V)=3.3, Vout Adj(Min)(V)=3.3
U3: library part CMP-1329-00018-1, "MirrorBit Flash Non-Volatile Memory CMOS 3.0 Volt Core with Versatile I/O, Serial Peripheral Interface with Multi-I/O, 128 Mbit, 133 MHz, -40 to 85 degC, 16-Pin SO (SO3016), RoHS, Tube", Manufacturer=Spansion, Temperature Range="-40 to 85 degC", ComponentLink1Description="Manufacturer URL", ComponentLink1URL=http://www.spansion.com/Pages/Default.aspx, ComponentLink2Description=Datasheet, ComponentLink2URL=http://www.spansion.com/Support/Datasheets/S25FL128S_256S_00.pdf, ComponentLink3Description="Package Specification", ComponentLink3URL=http://www.spansion.com/Support/Datasheets/S25FL128S_256S_00.pdf, DatasheetVersion="Rev. 08", Density="128 Mbit", Mounting Technology="Surface Mount", OTP="1024 B", PackageDescription="16-Pin Wide Plastic Small Outline Package, Body 10.3 x 7.5 mm, Pitch 1.27 mm", Packing=Tube, PartNumber=S25FL128SAGMFI011, RoHS=TRUE, Speed="133 MHz", VCC="2.7 to 3.6 V"
X1 X2: library part CMP-0277-00003-1, "Ceramic Surface Mount Low Profile Quartz Crystal, 8 MHz, -20 to 70 degC, 4-Pin 6 x 3.6 x 1.2 mm SMD, RoHS, 1000pcs / Reel", Frequency="8 MHz", Load Capacitance CL="18 pF Typ.", Manufacturer=Abracon, PartNumber=ABMM2-8.000MHZ-E2-T, Shunt Capacitance C0="7 pF Max.", Temperature Range="-20 to 70 degC", ComponentLink1Description="Manufacturer URL", ComponentLink1URL=http://www.abracon.com/, ComponentLink2Description=Datasheet, ComponentLink2URL=http://www.abracon.com/Resonators/ABMM2.pdf, ComponentLink3Description="Package Specification", ComponentLink3URL=http://www.abracon.com/Resonators/ABMM2.pdf, DatasheetVersion=Jan-13, ESR="72 Ohm Max.", Mounting Technology="Surface Mount", PackageDescription="4-Pin SMD, Body 6 x 3.6 mm, Pitch 4.4 mm", Packing="1000pcs / Reel", RoHS=TRUE

## Free pads (board coordinates)
  round 3 hole 3: 0(82.931,20.701) 0(83.693,69.596) 0(139.319,69.723) 0(139.7,20.447)

## Via types
v1: diameter 0.6, hole 0.3, Top Layer to Bottom Layer, 91 vias
v2: diameter 0.8, hole 0.4, Top Layer to Bottom Layer, 5 vias

## Nets (pads, with @x,y where several pads share a name; then routed paths per layer and width w, separated by ;. In a path a pad name is that pad's centre, name@x,y a point inside that pad or via, vN(x,y) a via of type N, cw(c..) or ccw(c..) an arc to the next point about the centre after c; other vN are vias at no path point)
3V3_DEBUG: C14.2 C20.2 D1.1 D2.1 D3.1 IC2.6 IC2.29 Q1.2 R11.2 R21.1 U1.5 | length 26.4
  Top Layer w0.2: U1.5 79.563,45.4 v1(80.137,45.974) ; C14.2 86.329,49.187 87.052,49.187 87.395,49.53 v1(87.503,49.53) ; C20.2 88.225,54.483 R21.1 90.14,54.433 90.551,54.022 90.551,52.75 Q1.2 89.982,52.131 89.286,51.435 v1(89.154,51.435) ; v1(88.265,43.815) 91.809,40.271 D1.1 D2.1 D3.1 ; v1(98.425,54.356) 98.425,54.248 98.685,53.988 98.685,53.283 IC2.6 ; IC2.29 101.831,51.137 102.409,51.137 102.5,51.046 v1(102.608,51.046) ; v1(103.505,54.61) 105.729,54.61 107.33,53.009 R11.2
3V3_MCU: C3.2 C4.2 C5.2 C6.2 C7.2 C8.2 C9.2 C10.2 C11.2 C12.2 C16.2 C23.2 IC1.1 IC1.10 IC1.22 IC1.33 IC1.42 IC1.43 IC1.44 IC1.48 IC1.49 J3.2 J3.4 P1.1 R2.2 R22.2 R23.2 R24.1 R25.1 R26.1 U2.5 U2.6 U3.2 | length 283.2
  Top Layer w0.2: v1(111.125,46.228) 112.055,47.158 ; IC1.49 113.135,45.158 112.954,45.339 113.011,45.339 113.23,45.558 IC1.48 ; IC1.44 112.055,47.158 ; IC1.43 112.455,47.558 ; IC1.1 114.875,42.485 115.062,42.672 118.237,42.672 118.475,42.434 IC1.10 118.475,36.941 v1@117.983,36.449 ; IC1.42 113.305,48.408 112.455,47.558 ; IC1.33 118.475,51.372 120.904,53.801 120.904,69.015 J3.2 ; IC1.22 121.758,45.158 121.939,45.339 v1(122.047,45.339) ; v1(126.746,51.308) 127.904,50.15 133.264,50.15 ; R22.2 133.264,50.15 ; R23.2 134.62,57.826 132.461,55.667 132.461,50.94 132.578,50.823 132.59,50.823 133.264,50.15 ; 112.055,47.158 112.455,47.558
  Top Layer w0.4: P1.1 82.946,54.595 R2.2 84.709,52.277 82.343,49.911 U2.6 U2.5 82.018,48.741 84.094,48.741 C16.2 C16.2@84.151,48.848 ; v1(90.805,58.801) 85.979,63.627 85.979,70.378 86.213,70.612 101.727,70.612 105.791,66.548 113.357,66.548 J3.4@115.824,69.015 ; v1(113.665,34.036) 115.563,34.036 v1(117.981,36.453) ; J3.4 J3.4@115.824,69.015 ; J3.2@120.904,69.015 119.754,67.865 116.974,67.865 J3.4@115.824,69.015 ; v1(124.206,35.941) 125.476,37.211 v1(125.476,41.148) ; R24.1 R25.1 140.059,25.437 140.059,27.167 140.17,27.278 140.17,28.283 v1(140.208,28.321)
  Bottom Layer w0.2: C3.2 123.785,51.104 124.878,52.197 125.857,52.197 v1(126.746,51.308)
  Bottom Layer w0.4: P1.1 84.963,57.404 86.36,58.801 v1(90.805,58.801) 92.547,58.801 92.928,59.182 105.664,59.182 106.934,57.912 106.934,56.519 107.168,56.285 108.053,56.285 112.268,52.07 112.268,48.26 112.547,47.981 112.547,47.65 v1(111.125,46.228) 112.014,45.339 v1(112.903,45.339) 113.792,44.45 113.792,40.64 ; U3.2 C23.2 107.783,37.007 108.316,37.54 108.316,37.585 112.006,41.275 113.157,41.275 113.792,40.64 ; v1(113.665,34.036) C8.2 C9.2 C10.2 C11.2 C12.2 ; v1(122.047,45.339) 122.714,44.672 C6.2 ; C3.2 C4.2 C5.2 C6.2 ; v1(125.476,41.148) 125.438,41.186 125.049,41.186 124.335,41.9 124.335,41.945 123.785,42.495 C6.2 ; v1(140.208,28.321) 133.35,28.321 131.572,30.099 124.335,30.099 v1(117.981,36.453) 123.639,36.453 124.152,35.941 v1(124.206,35.941) 124.244,35.979 124.244,36.352 124.333,36.441 124.333,38.481 122.174,40.64 113.792,40.64
  other v1: 83.312,50.8
5V: C13.2 C15.2 J1.1 J2.1 J3.5 J3.8 U1.1 U1.3 U2.3 U2.4 | length 82.8
  Top Layer w0.5: U1.3 76.268,43.5 79.89,39.878 J2.1 81.661,40.005 81.661,43.267 81.403,43.525 81.403,43.575 81.203,43.775 C13.2 C15.2 ; U1.1 76.172,45.429 76.172,46.708 v2(76.2,46.736) v2(76.2,47.625) 76.257,47.682 76.257,48.591 76.307,48.641 U2.4 U2.3
  Bottom Layer w0.5: v2(76.2,47.625) 76.2,55.245 75.184,56.261 75.184,68.326 76.835,69.977 80.264,69.977 83.058,67.183 83.058,67.095 83.351,66.802 105.371,66.802 ; J3.8 105.664,67.095 105.371,66.802 ; J3.5 113.284,69.015 111.071,66.802 105.371,66.802
  other v2: 78.867,40.894 77.089,46.736 77.089,47.625
GND: C1.1 C2.1 C3.1 C4.1 C5.1 C6.1 C7.1 C8.1 C9.1 C10.1 C11.1 C12.1 C13.1 C14.1 C15.1 C16.1 C17.1 C18.1 C19.1 C20.1 C21.1 C22.1 C23.1 IC1.57 IC2.EXP J3.6 J3.7 J3.29 J4.5 J5.5 P1.3 P1.5 P1.7 P1.9 P4.1 P4.10 R1.2 SW1.1 SW2.3 SW3.3 U1.2 U2.1 U2.2 U3.10 X1.2 X1.4 X2.2 X2.4 | length 191.6
  Top Layer w0.2: C16.1@83.801,47.098 83.801,47.148 84.151,47.498 C16.1 C16.1@84.212,47.487 ; R1.2 86.41,54.595 87.385,55.57 87.788,55.57 C20.1 88.138,57.063 87.757,57.444 v1(87.757,57.531) ; v1(94.488,58.166) 94.575,58.166 94.956,58.547 95.718,58.547 C22.1 97.605,58.587 X2.4 100.449,58.985 101.399,59.935 104.657,59.935 106.045,58.547 106.045,58.33 104.825,57.11 C21.1 104.7,57.185 103.003,57.185 X2.2 ; C18.1 98.679,43.521 v1(98.679,42.291) ; v1(105.41,43.434) 105.41,43.542 105.664,43.796 C19.1 ; C17.1 107.482,51.358 107.832,51.708 108.35,51.708 v1(109.347,52.705) ; J3.29 124.964,21.155 127.508,23.699 127.508,37.933 C2.1 127.468,38.023 126.943,38.548 X1.2 ; C2.1@127.468,37.923 128.307,37.084 ; C1.1 128.818,45.27 X1.4 129.343,42.488 130.358,41.473 130.358,38.029 129.413,37.084 128.307,37.084 ; P4.10 129.436,67.841 129.944,67.841 131.064,68.961 135.763,68.961 137.795,66.929 137.795,64.54 140.807,61.527 SW3.3 140.807,56.187 140.207,55.587 140.169,55.587 138.938,54.356 138.938,51.468 140.807,49.599 140.807,43.122 140.449,42.764 140.088,42.764 136.78,39.457 136.78,32.753 SW1.1 133.238,32.153 128.307,37.084
  Top Layer w0.5: U2.2 75.057,51.181 74.676,50.8 ; U2.1 74.969,52.451 74.676,52.158 74.676,50.8 ; 77.597,51.752 78.295,51.054 v1(78.359,51.054) ; J5.5 83.469,31.974 v1(84.201,31.242) ; J4.5 v1(80.899,21.814) ; C16.1@83.801,47.098 82.931,46.228 C15.1 C13.1 80.431,45.125 79.756,44.45 U1.2 74.969,44.45 74.676,44.743 74.676,50.8 ; C16.1@84.212,47.487 C14.1
  Bottom Layer w0.2: C23.1 109.483,37.307 109.483,37.842 112.154,40.513 113.283,40.513 113.665,40.131 C8.1
  Bottom Layer w0.4: C8.1 C9.1 C10.1 C11.1 C12.1 ; C7.1 C6.1 C5.1 C4.1 C3.1
  Bottom Layer w0.5: v1(80.899,21.814) 82.834,23.749 90.424,23.749 91.821,25.146 91.821,26.543
  other v1: 127.508,31.496 116.332,44.069 117.094,44.069 117.856,44.069 118.618,44.069 116.332,44.958 117.094,44.958 117.856,44.958 118.618,44.958 116.332,45.808 117.094,45.808 117.856,45.808 118.618,45.808 98.679,49.911 99.568,49.911 100.457,49.911 98.679,50.8 99.568,50.8 100.457,50.8 79.121,51.054 98.679,51.689 99.568,51.689 100.457,51.689 78.359,51.816 79.121,51.816 78.359,52.451 79.121,52.451
NetC1_2: C1.2 IC1.21 X1.1 | length 8.6
  Top Layer w0.2: IC1.21 126.93,44.758 X1.1 127.468,45.27 C1.2
NetC2_2: C2.2 IC1.20 X1.3 | length 12.8
  Top Layer w0.2: IC1.20 125.147,44.358 128.36,41.145 128.743,41.145 129.343,40.545 X1.3 128.818,39.82 C2.2
NetC17_2: C17.2 IC2.2 R11.1 | length 8.2
  Top Layer w0.2: IC2.2 100.731,53.317 100.731,53.527 100.801,53.597 100.801,53.69 101.341,54.229 102.687,54.229 103.582,53.334 105.705,53.334 106.03,53.009 R11.1 106.132,52.857 C17.2
NetC21_2: C21.2 IC2.4 X2.3 | length 9.5
  Top Layer w0.2: IC2.4 99.691,56.273 101.603,58.185 101.603,58.385 102.203,58.985 X2.3 102.928,58.46 C21.2
NetC22_2: C22.2 IC2.5 X2.1 | length 6.4
  Top Layer w0.2: C22.2 95.808,57.237 96.46,56.585 X2.1 98.203,56.585 98.803,55.985 98.803,55.121 99.191,54.733 IC2.5
NetD1_2: D1.2 R12.2 | length 1.9
  Top Layer w0.2: D1.2 R12.2
NetD2_2: D2.2 R13.2 | length 1.9
  Top Layer w0.2: D2.2 R13.2
NetD3_2: D3.2 R14.2 | length 1.9
  Top Layer w0.2: D3.2 R14.2
NetD4_1: D4.1 R24.2 | length 2
  Top Layer w0.2: D4.1 R24.2@138.796,23.596
NetD4_2: D4.2 R9.1 | length 1.8
  Top Layer w0.2: R9.1 133.518,23.596 D4.2
NetD5_1: D5.1 R25.2 | length 2
  Top Layer w0.2: D5.1 R25.2
NetD5_2: D5.2 R7.1 | length 1.8
  Top Layer w0.2: R7.1 133.518,25.4 D5.2
NetD6_1: D6.1 R26.2 | length 1.8
  Top Layer w0.2: D6.1 R26.2
NetD6_2: D6.2 R5.1 | length 1.9
  Top Layer w0.2: R5.1 135.368,27.178 D6.2
NetIC1_2: IC1.2 J3.16 | length 34.5
  Top Layer w0.2: J3.16 90.424,21.284 99.845,30.705 106.143,30.705 115.275,39.837 IC1.2
NetIC1_3: IC1.3 J3.15 | length 39.8
  Top Layer w0.2: J3.15@88.036,20.982 88.602,20.416 88.701,20.416 89.829,19.288 90.541,19.288 90.579,19.288 90.662,19.288 91.503,20.129 91.503,20.295 91.474,20.441 91.474,21.155 ccw(c90.424,21.155) 91.471,21.234 91.471,21.836 99.99,30.355 106.301,30.355 115.675,39.729 IC1.3
  Top Layer w0.254: J3.15 J3.15@87.884,21.155
NetIC1_4: IC1.4 J3.25 | length 59.1
  Top Layer w0.2: J3.25 114.681,20.955 112.776,19.05 93.36,19.05 92.726,19.685 92.694,19.716 cw(c93.153,21.026) 91.833,20.596 cw(c92.024,20.656) 91.824,20.654 91.824,21.3 91.821,21.303 91.821,21.691 100.135,30.005 106.459,30.005 116.075,39.621 IC1.4
NetIC1_5: IC1.5 J3.17 | length 34
  Top Layer w0.2: J3.17 92.964,22.339 98.438,27.813 104.84,27.813 116.475,39.448 IC1.5
NetIC1_6: IC1.6 J3.18 | length 33.2
  Top Layer w0.2: J3.18 95.631,21.082 95.631,24.511 98.552,27.432 105.029,27.432 116.884,39.287 116.884,40.23 116.875,40.24 IC1.6
NetIC1_7: IC1.7 J3.19 | length 31.6
  Top Layer w0.2: J3.19 98.044,25.208 99.887,27.051 105.156,27.051 117.275,39.17 IC1.7
NetIC1_8: IC1.8 J3.31 | length 41.3
  Top Layer w0.2: v1(114.808,35.56) 114.808,36.195 117.675,39.062 IC1.8
  Bottom Layer w0.2: v1(114.808,35.56) 114.87,35.622 115.381,35.622 122.428,28.575 131.572,28.575 133.885,26.262 133.885,19.912 133.405,19.431 131.368,19.431 130.044,20.755 J3.31
NetIC1_9: IC1.9 J3.32 | length 37.5
  Top Layer w0.2: v1@116.459,36.322 118.075,37.938 IC1.9
  Bottom Layer w0.2: v1(116.457,36.326) 114.304,36.326 114.115,36.137 114.115,35.237 114.342,35.01 115.485,35.01 122.301,28.194 131.445,28.194 132.969,26.67 132.969,21.919 132.584,21.534 J3.32
NetIC1_11: IC1.11 R5.2 R6.1 | length 62.1
  Top Layer w0.2: R6.1 R6.1@100.38,25.542 ; v1(101.725,24.261) 101.661,24.261 R6.1@100.38,25.542 ; IC1.11 118.875,35.69 109.826,26.641 102.714,26.641 101.615,25.542 R6.1@100.38,25.542 ; v1@130.81,27.178 R5.2
  Bottom Layer w0.2: v1@101.727,24.257 102.743,25.273 128.898,25.273 v1(130.808,27.182)
NetIC1_12: IC1.12 R7.2 R8.1 | length 56.3
  Top Layer w0.2: R8.1 R8.1@103.174,25.415 ; v1(104.265,24.261) 104.265,24.324 R8.1@103.174,25.415 ; IC1.12 119.275,35.39 110.174,26.289 103.998,26.289 103.499,25.79 103.499,25.74 R8.1@103.174,25.415 ; v1@130.302,25.4 130.328,25.374 R7.2
  Bottom Layer w0.2: v1@104.267,24.257 104.902,24.892 129.632,24.892 v1(130.169,25.43)
NetIC1_13: IC1.13 R9.2 R10.1 | length 52.1
  Top Layer w0.2: R10.1 R10.1@105.587,25.415 ; v1(107.44,24.261) 106.741,24.261 R10.1@105.587,25.415 ; IC1.13 119.675,35.22 110.363,25.908 106.08,25.908 R10.1@105.587,25.415 ; v1@130.429,23.569 R9.2
  Bottom Layer w0.2: v1(107.44,24.261) 107.507,24.261 107.757,24.511 129.49,24.511 v1(130.427,23.574)
NetIC1_14: IC1.14 J3.23 | length 31.2
  Top Layer w0.2: J3.23 109.724,21.459 111.252,22.987 119.152,22.987 122.174,26.009 122.174,39.084 120.075,41.183 IC1.14
NetIC1_15: IC1.15 J3.24 | length 30
  Top Layer w0.2: J3.24 113.788,22.479 119.139,22.479 122.524,25.864 122.524,41.687 121.853,42.358 IC1.15
NetIC1_16: IC1.16 J3.26 | length 25.9
  Top Layer w0.2: J3.26 117.561,21.172 118.327,21.172 122.874,25.719 122.874,41.832 121.948,42.758 IC1.16
NetIC1_17: IC1.17 J3.27 | length 25.2
  Top Layer w0.2: J3.27 120.055,21.126 120.055,22.138 123.224,25.307 123.224,41.977 122.043,43.158 IC1.17
NetIC1_18: IC1.18 J3.28 | length 24.9
  Top Layer w0.2: IC1.18 122.138,43.558 123.574,42.122 123.574,25.162 123.571,25.159 123.571,25.126 122.424,23.979 J3.28
NetIC1_24: IC1.24 P1.4 P1.6 R1.1 R2.1 R17.2 | length 74.5
  Top Layer w0.2: P1.4 77.702,59.839 78.722,59.839 80.082,58.479 82.075,58.479 ; v1(82.804,56.007) R2.1@84.547,56.007 ; R1.1 86.31,55.895 83.726,58.479 82.075,58.479 ; IC1.24 122.463,45.958 122.574,45.847 v1(122.682,45.847) ; 82.075,58.479 R2.1@84.547,56.007 ; R2.1@84.547,56.007 84.597,56.007 R2.1 84.659,55.895 R2.1@84.547,56.007
  Bottom Layer w0.2: P1.4 77.702,60.049 78.722,60.049 79.459,60.786 79.506,60.833 ccw(c79.468,61.029) 79.572,60.859 cw(c80.137,59.944) 80.741,60.833 106.68,60.833 106.739,60.774 120.396,47.117 122.174,47.117 122.682,46.609 v1(122.682,45.847) ; v1(82.804,56.007) 82.804,53.975 83.693,53.086 84.47,53.086 R17.2
NetIC1_25: IC1.25 P1.2 R18.2 | length 61
  Top Layer w0.2: R18.2 107.33,49.453 107.655,49.778 108.312,49.778 110.421,51.887 113.367,51.887 113.721,52.241 v1(113.721,52.888) ; IC1.25 121.747,46.358 121.897,46.508 v1(122.005,46.508)
  Bottom Layer w0.2: P1.2 78.994,58.801 83.82,58.801 85.471,60.452 106.355,60.452 v1@113.721,53.086 ; v1(113.721,52.888) v1@113.721,53.086 ; v1(122.005,46.508) 120.299,46.508 v1@113.721,53.086
NetIC1_27: IC1.27 P4.4 | length 19.1
  Top Layer w0.2: IC1.27 121.453,47.158 121.666,47.371 121.666,50.419 127.127,55.88 129.794,55.88 130.429,56.515 130.429,58.674 P4.4
NetIC1_28: IC1.28 P4.2 | length 13.8
  Top Layer w0.2: IC1.28 120.925,50.173 128.034,57.282 129.037,57.282 P4.2
NetIC1_29: IC1.29 P4.7 | length 23
  Top Layer w0.2: IC1.29 120.075,49.818 123.934,53.677 123.934,58.402 126.551,61.019 129.214,61.019 130.513,62.318 130.513,63.838 P4.7
NetIC1_30: IC1.30 P4.9 | length 24.7
  Top Layer w0.2: IC1.30 119.675,49.913 123.571,53.809 123.571,58.512 123.584,58.547 127.685,63.261 128.373,63.949 129.604,63.949 130.513,64.858 130.513,66.378 P4.9
NetIC1_31: IC1.31 P4.8 | length 20.7
  Top Layer w0.2: IC1.31 119.275,50.008 123.19,53.923 123.19,58.721 127.437,63.509 128.952,65.024 P4.8
NetIC1_32: IC1.32 P4.6 | length 18.3
  Top Layer w0.2: IC1.32 118.875,50.674 v1@119.634,51.433
  Bottom Layer w0.2: v1(119.634,51.434) 119.634,52.959 P4.6
NetIC1_34: IC1.34 P4.5 | length 24.1
  Top Layer w0.2: IC1.34 118.075,51.877 118.216,52.018 118.236,52.018 118.526,52.308 v1(118.634,52.308)
  Bottom Layer w0.2: v1(118.634,52.308) 118.634,51.655 119.405,50.884 119.898,50.884 120.184,51.17 120.184,53.001 128.27,61.087 130.048,61.087 131.445,62.484 P4.5
NetIC1_35: IC1.35 P4.3 | length 28.4
  Top Layer w0.2: IC1.35 117.675,52.127 118.364,52.816 v1(118.364,53.594)
  Bottom Layer w0.2: v1(118.364,53.594) 128.397,63.627 132.842,63.627 132.969,63.5 132.969,61.849 132.649,61.529 132.649,60.894 P4.3
NetIC1_36: IC1.36 R23.1 SW3.2 | length 35.9
  Top Layer w0.2: IC1.36 117.275,52.397 117.475,52.597 v1(117.475,52.705) ; v1(128.524,54.808) 131.106,54.808 133.604,57.305 133.604,59.954 133.721,60.071 134.523,60.071 R23.1 134.62,60.071 134.62,63.6 136.307,65.287 SW3.2
  Bottom Layer w0.2: v1(117.475,52.705) 117.475,51.5 118.441,50.534 120.892,50.534 121.791,51.433 121.791,52.83 123.769,54.808 v1(128.524,54.808)
NetIC1_37: IC1.37 R22.1 SW2.2 | length 32
  Top Layer w0.2: v1(116.713,53.213) 116.713,53.105 116.875,52.943 IC1.37 ; v1(133.223,53.467) 134.362,53.467 135.207,52.622 134.035,51.45 R22.1 ; 135.207,52.644 135.743,52.644 136.343,53.244 SW2.2
  Bottom Layer w0.2: v1(116.713,53.213) 116.713,51.767 118.315,50.165 121.031,50.165 122.301,51.435 122.301,52.728 123.831,54.258 132.432,54.258 v1(133.223,53.467)
NetIC1_38: IC1.38 J3.9 | length 27.4
  Top Layer w0.2: J3.9 100.817,68.982 100.817,68.093 116.475,52.435 IC1.38
NetIC1_39: IC1.39 J3.10 | length 29